# Altium PCB mix_v3.PcbDoc
Units mil, origin at the board's own origin, x right, y up, seen from the top; angles counter-clockwise.
Board outline 3779.53 x 1850.39 mil, 2 copper layers (Top Layer, Top, Bottom Layer, Bottom); 67 components, 40 nets, 207 pads, 64 vias.
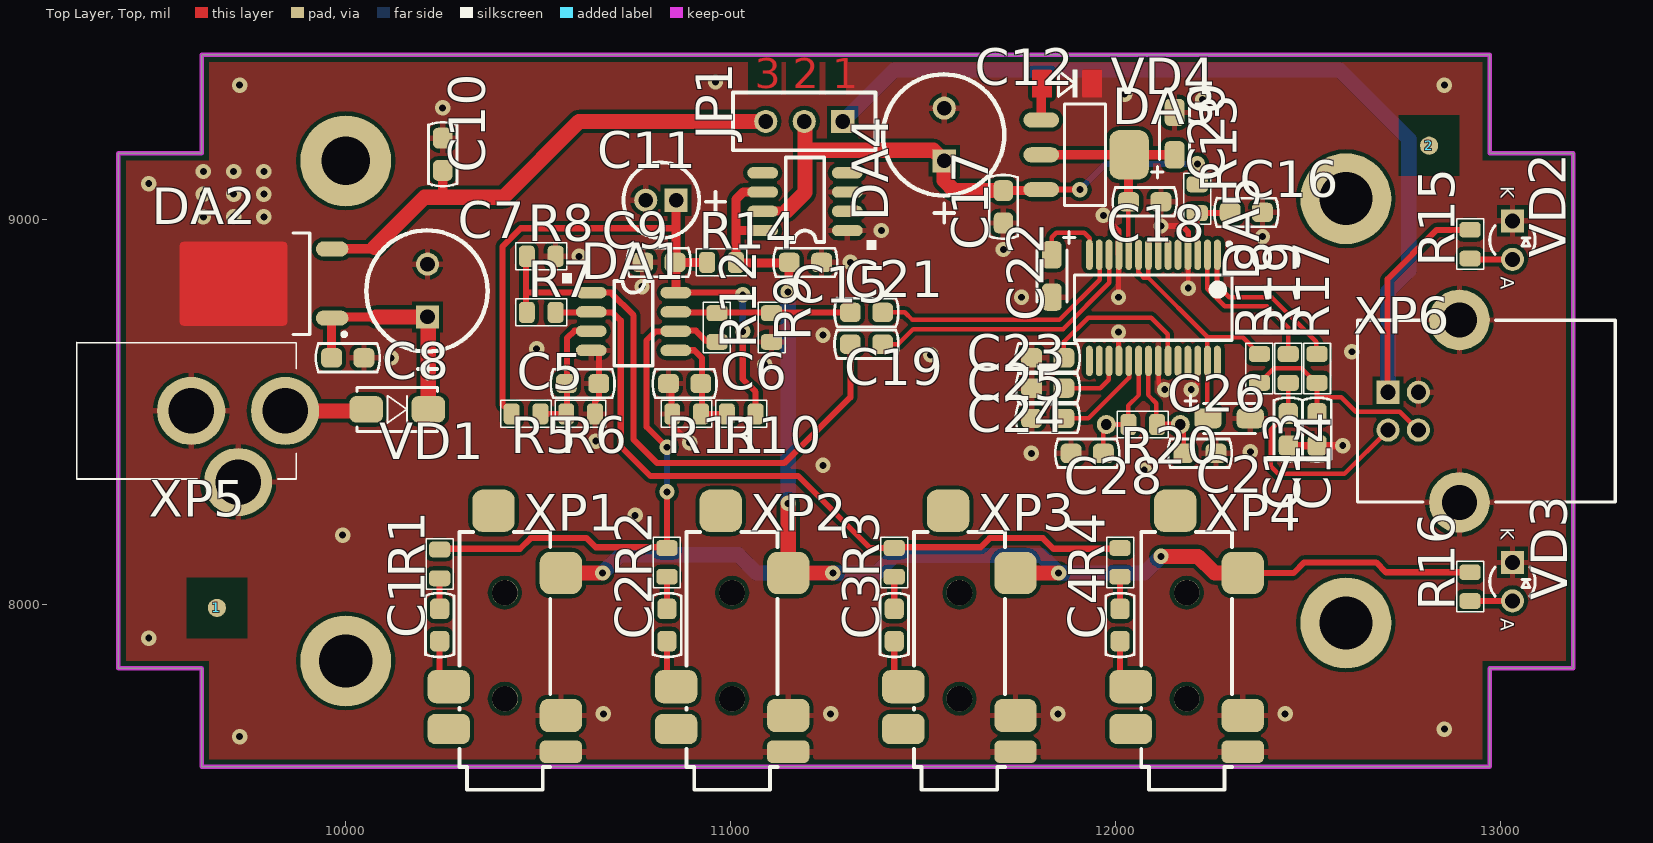
[diagram p0: Top Layer, Top view]
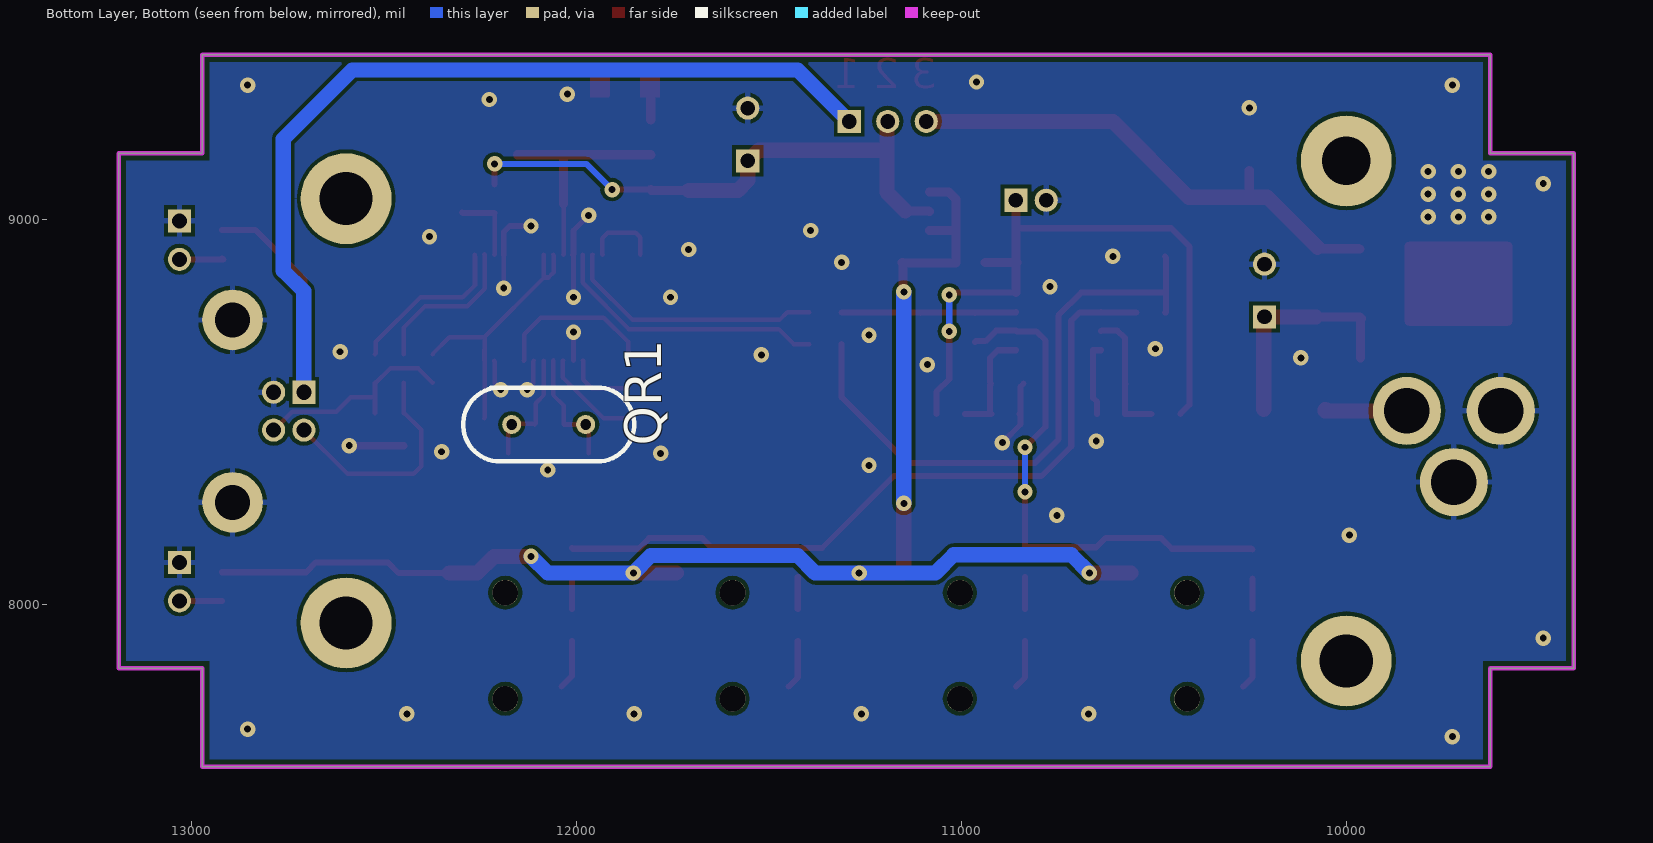
[diagram p1: Bottom Layer, Bottom view, seen from below]

## Layer stack, top to bottom
Top Solder, Top Mask: solder mask 0.4, Solder Resist, Dk 3.5
Top Layer, Top: signal copper 1.4
Dielectric 1: dielectric 12.6, FR-4, Dk 4.8
Bottom Layer, Bottom: signal copper 1.4
Bottom Solder, Bot Mask: solder mask 0.4, Solder Resist, Dk 3.5

## Board outline
12972.44,7834.65 13188.98,7834.65 13188.98,9173.23 12972.44,9173.23 12972.44,9429.13 9625.98,9429.13 9625.98,9173.23 9409.45,9173.23 9409.45,7834.65 9625.98,7834.65 9625.98,7578.74 12972.44,7578.74

## Design rules (kind name [scope] priority, off if disabled: settings)
Clearance [All] p1: gap=10 except(7.87: Arc-Arc Arc-Track Arc-THPad Arc-Via Track-Track Track-THPad Track-Via THPad-THPad THPad-Via Via-Via)
PlaneClearance [All] p1: clearance=10
PolygonConnect PolygonConnect_4 [IsPolygon And InNet('GND') And OnLayer('Bottom Layer, Bottom') vs IsVia] p1: connectstyle=Direct reliefconductorwidth=15 reliefentries=4 polygonreliefangle="90 Angle" airgapwidth=10
PolygonConnect PolygonConnect_3 [IsPolygon And InNet('GND') And OnLayer('Bottom Layer, Bottom') vs IsPad] p2: connectstyle=Relief reliefconductorwidth=15 reliefentries=4 polygonreliefangle="90 Angle" airgapwidth=10
PolygonConnect PolygonConnect_2 [IsPolygon And InNet('GND') And OnLayer('Top Layer, Top') vs IsVia] p3: connectstyle=Direct reliefconductorwidth=15 reliefentries=4 polygonreliefangle="90 Angle" airgapwidth=10
PolygonConnect PolygonConnect_1 [IsPolygon And InNet('GND') And OnLayer('Top Layer, Top') vs IsPad] p4: connectstyle=Relief reliefconductorwidth=15 reliefentries=4 polygonreliefangle="90 Angle" airgapwidth=10
PolygonConnect [All] p5: connectstyle=Relief reliefconductorwidth=10 reliefentries=4 polygonreliefangle="90 Angle" airgapwidth=10
RoutingVias [All] p1: holewidth=28 width=50 viastyle="Through Hole" minholewidth=28 minwidth=50 maxholewidth=28 maxwidth=50
SolderMaskExpansion [All] p1: expansion=4
Width [All] p1: maxlimit=10 minlimit=10 preferedwidth=10
29 further rules are at their usual default settings.

## Components (designator, comment, footprint, x,y, rotation, side; value= is the part's Value field where it differs from the comment)
1 "{Value}" REPER1.2 9665.35,7992.13 r0 top
2 "{Value}" REPER1.2 12814.96,9192.91 r0 top
C1 "0.1uF" CC0805-MIDI-2M1 10244.09,7905.51 r90 top
C2 "0.1uF" CC0805-MIDI-2M1 10834.65,7905.51 r90 top
C3 "0.1uF" CC0805-MIDI-2M1 11425.2,7905.51 r90 top
C4 "0.1uF" CC0805-MIDI-2M1 12011.81,7905.51 r90 top
C5 "1uF" CC0805-MIDI-2M1 10657.48,8574.8 r180 top
C6 "1uF" CC0805-MIDI-2M1 10838.58,8574.8 r0 top
C7 "470uFx25V" CC8X11 10212.6,8748.03 r90 top
C8 "0.1uF" CC0805-MIDI-2M1 10047.24,8641.73 r180 top
C9 "0.1uF" CC0805-MIDI-2M1 10771.65,8889.76 r0 top
C10 "0.1uF" CC0805-MIDI-2M1 10251.97,9212.6 r270 top
C11 "10uFx16V" CC4X8 10858.27,9051.18 r180 top
C12 "220uFx16V" CC8X11 11555.12,9153.54 r90 top
C13 "22 pF" CC0805-MIDI-2M1 12448.82,8413.39 r90 top
C14 "22 pF" CC0805-MIDI-2M1 12523.62,8413.39 r90 top
C15 "0.1uF" CC0805-MIDI-2M1 11236.22,8889.76 r180 top
C16 "1uF" CC0805-MIDI-2M1 12381.89,9019.68 r180 top
C17 "0.1uF" CC0805-MIDI-2M1 11708.66,8992.13 r90 top
C18 "0.1uF" CC0805-MIDI-2M1 12118.11,9047.24 r180 top
C19 "1uF" CC0805-MIDI-2M1 11311.02,8677.17 r0 top
C20 "10uF" TAJ-A_M 12153.54,9169.29 r90 top
C21 "1uF" CC0805-MIDI-2M1 11311.02,8759.84 r0 top
C22 "10uF" TAJ-A_M 11834.65,8909.45 r270 top
C23 "1uF" CC0805-MIDI-2M1 11866.14,8641.73 r180 top
C24 "1uF" CC0805-MIDI-2M1 11866.14,8484.25 r180 top
C25 "1uF" CC0805-MIDI-2M1 11866.14,8562.99 r180 top
C26 "10uF" TAJ-A_M 12240.16,8484.25 r0 top
C27 "33 pF" CC0805-MIDI-2M1 12177.17,8393.7 r0 top
C28 "33 pF" CC0805-MIDI-2M1 11968.5,8393.7 r180 top
DA1 "" SO-8 10637.8,8811.02 r0 top
DA2 "" D-PAK(TO-252AA) 9787.4,8834.65 r180 top
DA3 "REG1117-3.3" SOT-223 11921.26,9169.29 r270 top
DA4 "" SO-8 11303.15,8972.44 r180 top
DA5 "" TSSOP28 12098.43,8771.65 r270 top
JP1 "" PIN3W 11291.34,9255.91 r180 top
QR1 "12 MHz" QR_LP_3_5 11976.38,8468.5 r0 bottom
R1 "12k" RC0805_2 10244.09,8106.3 r90 top
R2 "12k" RC0805_2 10834.65,8110.24 r90 top
R3 "12k" RC0805_2 11425.2,8110.24 r90 top
R4 "12k" RC0805_2 12011.81,8110.24 r90 top
R5 "12k" RC0805_2 10468.5,8496.06 r180 top
R6 "12k" RC0805_2 10610.24,8496.06 r180 top
R7 "12k" RC0805_2 10507.87,8759.84 r180 top
R8 "2K7" RC0805_2 10507.87,8905.51 r0 top
R9 "2K7" RC0805_2 11106.3,8720.47 r270 top
R10 "12k" RC0805_2 11027.56,8496.06 r0 top
R11 "12k" RC0805_2 10885.83,8496.06 r0 top
R12 "12k" RC0805_2 10964.57,8720.47 r90 top
R13 "2.2 Om" RC0805_2 12212.6,9055.12 r270 top
R14 "10" RC0805_2 10976.38,8889.76 r0 top
R15 "560" RC0805_2 12921.26,8937.01 r90 top
R16 "470" RC0805_2 12921.26,8047.24 r90 top
R17 "22" RC0805_2 12523.62,8614.17 r90 top
R18 "1k5" RC0805_2 12374.02,8614.17 r90 top
R19 "22" RC0805_2 12448.82,8614.17 r90 top
R20 "1M" RC0805_2 12070.87,8468.5 r0 top
VD1 "" SMA 10133.86,8507.87 r0 top
VD2 "" LED3 13031.5,8997.64 r270 top
VD3 "" LED3 13031.5,8110.24 r270 top
VD4 "" SOD80 11874.02,9354.33 r180 top
XP1 "{Value}" SJ-43514-SMT 10413.39,7755.91 r0 top
XP2 "{Value}" SJ-43514-SMT 11003.94,7755.91 r0 top
XP3 "{Value}" SJ-43514-SMT 11594.49,7755.91 r0 top
XP4 "{Value}" SJ-43514-SMT 12185.04,7755.91 r0 top
XP5 "DCJ2" DCJ25 9720.47,8318.9 r0 top
XP6 "" USB-B 12893.7,8503.94 r270 top

## Footprints (in the part's own frame and the unit in brackets; to place one, negate y for a bottom-side part, rotate by r counter-clockwise, add the part's x,y. Pads: shape width x height; smd on the part's side, far side on the other; paste and mask are expansions set on the pad)
CC4X8 [mil]
  rect 60x60 hole 38: 1(0,0)
  round 60 hole 38: 2(78.74,0)
  silkscreen extent -128,-98 136,98
CC8X11 [mil]
  rect 60x60 hole 38: 1(0,0)
  round 60 hole 38: 2(137,0)
  silkscreen extent -160,-156 225,159
CC0805-MIDI-2M1 [mil]
  rrect50% 54x50 smd: 1(0,0) 2(84,0)
  silkscreen extent -41,-37 125,37
D-PAK(TO-252AA) [mm]
  oval 2.15x1 smd: 1(-4.5,2.28) 3(-4.5,-2.28)
  round 0 smd paste-25.4 mask-25.4: 2(2,0)
  Top Layer, Top region: -1.55,-2.5 -1.513,-2.638 -1.412,-2.738 -1.275,-2.775 5.275,-2.775 5.413,-2.738 5.513,-2.638 5.55,-2.5 5.55,2.5 5.513,2.638 5.413,2.738 5.275,2.775 -1.275,2.775 -1.412,2.738 -1.513,2.638 -1.55,2.5
  silkscreen extent -5.42,-3.35 -1.92,3.47
DCJ25 [mm]
  round 4.5 hole 3: 1(-3.1,4.7) 2(0,0) 3(3.1,4.7)
  silkscreen extent -10.65,0.2 3.84,9.2
LED3 [mil]
  rect 60x60 hole 39: 1(0,0)
  round 60 hole 39: 2(100,0)
  silkscreen extent 12,-59 88,59
PIN3W [mil]
  rect 60x60 hole 38: 1(0,0)
  round 60 hole 38: 2(100,0) 3(200,0)
  silkscreen extent -85,-75 285,75
QR_LP_3_5 [mm]
  round 1.25 hole 0.7: 1(0,0) 2(4.88,0)
  silkscreen extent -3.2,-2.44 8.08,2.44
RC0805_2 [mm]
  rrect50% 1.05x1.4 smd: 1(-0.95,0) 2(0.95,0)
  silkscreen extent -1.67,-0.89 1.67,0.89
REPER1.2 [mm]
  round 1.2 smd paste-25.4 mask-25.4: 1(0,0)
SJ-43514-SMT [mm]
  rrect50% 2.8x1.5 smd: 1(3.7,-3.5)
  rrect50% 2.8x2.8 smd: 2(3.7,8.3) 5(-0.75,12.4)
  rrect50% 2.8x2.2 smd: 3(-3.7,0.8) 4(3.7,-1.1)
  rrect50% 2.8x2 smd: 6(-3.7,-2)
  round 1.7 hole 1.7 unplated: 7(0,7) 8(0,0)
  silkscreen extent -3,-6 3,11
SMA [mm]
  rrect50% 2.2x1.75 smd: 1(-2.05,0) 2(2.05,0)
  silkscreen extent -2.65,-1.45 2.65,1.45
SO-8 [mil]
  oval 80x29.53 smd: 1(0,0) 2(0,-50) 3(0,-100) 4(0,-150) 5(220,-150) 6(220,-100) 7(220,-50) 8(220,0)
  silkscreen extent -75,-190 160,50
SOD80 [mil]
  round 0 smd paste-1000 mask-1000: 1(65,0) 2(-65,0)
  Top Layer, Top region: 39.41,-33.07 40.27,-35.16 42.36,-36.02 87.64,-36.02 89.73,-35.16 90.59,-33.07 90.59,33.07 89.73,35.16 87.64,36.02 42.36,36.02 40.27,35.16 39.41,33.07
  Top Layer, Top region: -39.41,33.07 -40.27,35.16 -42.36,36.02 -87.64,36.02 -89.73,35.16 -90.59,33.07 -90.59,-33.07 -89.73,-35.16 -87.64,-36.02 -42.36,-36.02 -40.27,-35.16 -39.41,-33.07
  silkscreen extent -26,-36 22,36
SOT-223 [mm]
  oval 1x2.35 smd: 1(-2.3,-2.9) 2(0,-2.9) 3(2.3,-2.9)
  rrect50% 3.25x2.6 smd: 4(0,2.9)
  silkscreen extent -3.35,-1.35 3.35,1.35
TAJ-A_M [mm]
  rrect50% 1.8x1.3 smd: 1(0,0) 2(2.794,0)
  silkscreen extent -1.52,-0.99 3.12,1.52
TSSOP28 [mm]
  oval 2x0.45 smd: 1(-3.5,4.225) 2(-3.5,3.575) 3(-3.5,2.925) 4(-3.5,2.275) 5(-3.5,1.625) 6(-3.5,0.975) 7(-3.5,0.325) 8(-3.5,-0.325) 9(-3.5,-0.975) 10(-3.5,-1.625) 11(-3.5,-2.275) 12(-3.5,-2.925) 13(-3.5,-3.575) 14(-3.5,-4.225) 15(3.5,-4.225) 16(3.5,-3.575) 17(3.5,-2.925) 18(3.5,-2.275) 19(3.5,-1.625) 20(3.5,-0.975) 21(3.5,-0.325) 22(3.5,0.325) 23(3.5,0.975) 24(3.5,1.625) 25(3.5,2.275) 26(3.5,2.925) 27(3.5,3.575) 28(3.5,4.225)
  silkscreen extent -4.32,-5.2 2.14,5.2
USB-B [mm]
  rect 1.524x1.524 hole 1: 1(-1.23,-4.71)
  round 1.524 hole 1: 2(1.27,-4.71) 3(1.27,-2.71) 4(-1.23,-2.71)
  round 4 hole 2.3: 5(-6,0) 6(6.04,0)
  silkscreen extent -5.98,-6.72 6.02,10.28

## Free pads (board coordinates)
  round 236.22 hole 137.8 unplated: 0(10000,7854.33) 0(12598.43,7952.76) 0(12598.43,9055.12)
  round 236.22 hole 125.98 unplated: 0(10000,9153.54)

## Via types
v1: diameter 40, hole 18, Top Layer, Top to Bottom Layer, Bottom, 64 vias

## Nets (pads, with @x,y where several pads share a name; then routed paths per layer and width w, separated by ;. In a path a pad name is that pad's centre, name@x,y a point inside that pad or via, vN(x,y) a via of type N, cw(c..) or ccw(c..) an arc to the next point about the centre after c; other vN are vias at no path point)
+3.5V: C18.2 C20.1 DA3.2 DA3.4 DA5.10 | length 613.7
  Top Layer, Top w11.81: C18.2 12034.11,9041.98 12033.46,9041.34 12033.46,8910.43 DA5.10
  Top Layer, Top w23.62: DA3.2 DA3.4 ; C18.2@12033.46,9041.34 12033.46,9167.32 DA3.4 ; C20.1 DA3.4
+5V: C12.1 C17.2 DA3.3 DA4.7 JP1.2 R13.1 | length 1491.9
  Top Layer, Top w15.75: DA3.3 v1(11907.48,9078.74) ; R13.1 v1(12212.6,9145.67)
  Top Layer, Top w23.62: DA4.7 11084.33,9023.62 11145.67,9023.62 ; C17.2 11708.66,9076.77 11805.12,9076.77 DA3.3
  Top Layer, Top w39.37: 11145.67,9023.62 11192.91,9070.87 11192.91,9181.1 ; JP1.2 11192.91,9255.91 11192.91,9181.1 ; C17.2 11708.02,9076.77 11580.71,9076.77 11555.12,9102.36 C12.1 11527.56,9181.1 11192.91,9181.1
  Bottom Layer, Bottom w15.75: v1(11907.48,9078.74) 11974.41,9145.67 v1(12212.6,9145.67)
GND: C5.1 C6.1 C7.2 C8.1 C9.1 C10.1 C11.2 C12.2 C13.1 C14.1 C15.1 C16.1 C17.1 C18.1 C20.2 C22.2 C23.2 C24.2 C25.2 C26.2 C27.2 C28.2 DA1.4 DA2.2 DA4.1 DA4.3 DA5.4 DA5.11 DA5.18 DA5.22 DA5.26 R6.1 R8.2 R9.2 R11.1 VD2.1 VD3.1 VD4.2 XP1.1 XP1.4 XP2.1 XP2.4 XP3.1 XP3.4 XP4.1 XP4.4 XP5.1 XP5.2 XP6.4 XP6.5 XP6.6 | length 1202.3
  Top Layer, Top w11.81: v1(12007.87,8708.66) 12007.87,8634.84 DA5.18 ; v1(12007.87,8799.21) 12007.87,8908.46 DA5.11 ; DA5.22 12112.2,8632.87 12112.2,8574.8 v1(12127.95,8559.06) ; v1(12188.98,8822.83) 12188.98,8908.46 DA5.4 DA5.4@12188.98,8909.45 ; v1(12196.85,8559.06) 12212.6,8574.8 12212.6,8631.89 DA5.26
  Top Layer, Top w14.96: v1(11968.5,9011.81) 12007.87,8972.44 12007.87,8910.43 DA5.11 ; v1(12118.11,8984.25) 12173.23,8984.25 12188.98,8968.5 DA5.4@12188.98,8909.45
  Top Layer, Top w15.75: DA1.4 10637.8,8661.42 10657.48,8661.42 C5.1 10657.48,8537.4 10647.64,8527.56 R6.1 ; C6.1 10846.46,8566.93 R11.1@10846.46,8496.06 ; R11.1 R11.1@10846.46,8496.06 ; v1(10893.7,8421.26) 10846.46,8468.5 R11.1@10846.46,8496.06
  Top Layer, Top w19.68: C13.1 C14.1 v1(12590.55,8413.39)
  other v1: 9724.41,7657.48 12854.33,7677.17 10669.29,7716.54 11259.84,7716.54 11850.39,7716.54 12440.94,7716.54 9488.19,7913.39 9992.13,8181.1 10751.97,8232.28 12074.8,8350.39 11240.16,8362.2 11781.5,8393.7 12350.39,8397.64 10649.61,8425.2 11088.58,8624.02 10118.11,8641.73 11519.68,8649.61 12614.17,8657.48 10496.06,8665.35 11240.16,8700.79 11755.91,8799.21 10769.68,8826.77 11311.02,8889.76 10606.3,8905.51 11708.66,8923.23 12381.89,8956.69 11391.73,8972.44 9629.92,9007.87 9708.66,9007.87 9787.4,9007.87 9629.92,9066.93 9708.66,9066.93 9787.4,9066.93 9488.19,9094.49 9629.92,9125.98 9708.66,9125.98 9787.4,9125.98 10251.97,9291.34 12226.38,9312.99 12023.62,9326.77 9724.41,9350.39 12854.33,9350.39 10960.63,9358.27
IN1: C1.1 XP1.3 | length 127.9
  Top Layer, Top w15.75: C1.1 10244.09,7811.02 XP1.3
IN2: C2.1 XP2.3 | length 127.9
  Top Layer, Top w15.75: C2.1 10834.65,7811.02 XP2.3
IN3: C3.1 XP3.3 | length 127.9
  Top Layer, Top w15.75: C3.1 11425.2,7811.02 XP3.3
IN4: C4.1 XP4.3 | length 129.5
  Top Layer, Top w15.75: C4.1 12011.81,7814.96 XP4.3
MIC_PW: C15.2 DA4.6 DA4.8 R14.2 R16.2 XP1.2 XP2.2 XP3.2 XP4.2 | length 3986.6
  Top Layer, Top w15.75: XP4.2 12462.6,8082.68 12490.16,8110.24 12677.17,8110.24 12702.76,8084.65 R16.2
  Top Layer, Top w23.62: DA4.8 11013.78,8972.44 ; DA4.6 11082.76,9072.83 11033.46,9072.83 11013.78,9053.15 11013.78,8972.44 ; v1(11149.61,8812.99) 11151.57,8814.96 C15.2@11151.57,8889.12 ; C15.2@11153.54,8889.76 C15.2 ; 11013.78,8972.44 R14.2 11013.78,8887.8 11150.25,8887.8 C15.2@11151.57,8889.12 ; C15.2@11151.57,8889.12 11151.57,8889.76 C15.2 ; C15.2@11151.57,8889.12 C15.2
  Top Layer, Top w39.37: XP1.2 v1(10667.32,8082.68) ; v1(11149.61,8263.78) XP2.2 v1(11265.75,8082.68) ; XP3.2 v1(11852.36,8082.68) ; v1(12118.11,8125.98) 12214.57,8125.98 12257.87,8082.68 XP4.2
  Bottom Layer, Bottom w39.37: v1(10667.32,8082.68) 10714.57,8129.92 11019.68,8129.92 11066.93,8082.68 v1(11265.75,8082.68) 11379.92,8082.68 11425.2,8127.95 11807.09,8127.95 v1(11852.36,8082.68) 12074.8,8082.68 v1(12118.11,8125.98) ; v1(11149.61,8263.78) v1(11149.61,8812.99)
NET00000: C1.2 R1.1 | length 79.4
  Top Layer, Top w15.75: C1.2 R1.1
NET00001: R15.1 VD2.2 | length 118.6
  Top Layer, Top w15.75: R15.1 12917.32,8897.64 VD2.2
NET00002: JP1.1 R15.2 XP6.1 | length 2842.9
  Top Layer, Top w15.75: XP6.1 12706.69,8553.94 12706.69,8846.46 12834.65,8974.41 R15.2
  Bottom Layer, Bottom w39.37: JP1.1 11425.2,9389.76 12582.68,9389.76 12761.81,9210.63 12761.81,8868.11 12708.66,8814.96 12708.66,8553.15 12708.66,8552.76 XP6.1
NET00003: C3.2 R3.1 | length 83.3
  Top Layer, Top w15.75: C3.2 R3.1
NET00004: C10.2 DA2.3 JP1.3 | length 1338.5
  Top Layer, Top w23.62: DA2.3 9967.72,8924.41 9968.5,8925.2 10074.8,8925.2 10074.8,8929.13 ; 10246.76,9059.06 10251.97,9062.99 C10.2
  Top Layer, Top w39.37: 10074.8,8929.13 10204.72,9059.06 10246.76,9059.06 10409.45,9059.06 10606.3,9255.91 JP1.3
NET00005: C7.1 C8.2 DA2.1 VD1.2 | length 602.3
  Top Layer, Top w23.62: C8.2 9963.24,8744.09 9960.63,8744.09 DA2.1 9964.57,8748.03 10078.74,8748.03
  Top Layer, Top w39.37: 10078.74,8748.03 C7.1 10214.57,8748.03 VD1.2
NET00006: C5.2 DA1.3 R5.1 R6.2 | length 343.8
  Top Layer, Top w15.75: R5.1 R6.2 ; R6.2@10574.8,8496.06 R6.2 ; DA1.3 10636.22,8712.6 10594.49,8712.6 10574.8,8692.91 C5.2@10574.8,8574.8 ; R6.2 10574.8,8498.03 C5.2@10574.8,8570.87 ; C5.2@10574.8,8570.87 C5.2@10574.8,8574.8 ; C5.2@10574.8,8570.87 C5.2 C5.2@10574.8,8574.8
NET00007: C22.1 DA5.14 | length 198
  Top Layer, Top w11.81: C22.1 11834.65,8954.72 11846.46,8966.54 11919.29,8966.54 11933.07,8952.76 11933.07,8910.43 DA5.14
NET00008: C2.2 R2.1 | length 83.3
  Top Layer, Top w15.75: C2.2 R2.1
NET00009: C4.2 R4.1 | length 83.3
  Top Layer, Top w15.75: C4.2 R4.1
NET00014: DA3.1 VD4.1 | length 96.4
  Top Layer, Top w23.62: DA3.1 11807.09,9354.33 VD4.1
NET00021: DA1.2 R3.2 R4.2 R7.1 | length 1936.7
  Top Layer, Top w15.75: R7.1 DA1.2@10637.8,8759.84 ; DA1.2 DA1.2@10637.8,8759.84 ; R4.2 12009.84,8145.67 11838.58,8145.67 11811.02,8173.23 11673.23,8173.23 11649.61,8149.61 11425.2,8149.61 R3.2 11362.2,8147.64 11175.2,8334.65 10791.34,8334.65 10714.57,8411.42 10714.57,8738.19 10692.91,8759.84 DA1.2@10637.8,8759.84
NET00023: DA1.6 R1.2 R2.2 R12.1 | length 1380.3
  Top Layer, Top w15.75: R1.2 10246.06,8145.67 10452.76,8145.67 10480.32,8173.23 10625.98,8173.23 10649.61,8149.61 R2.2@10834.65,8149.61 ; R2.2 R2.2@10834.65,8149.61 ; v1(10834.65,8293.31) R2.2@10834.65,8149.61 ; v1(10834.65,8409.45) 10781.5,8462.6 10781.5,8687.01 10805.12,8710.63 10856.3,8710.63 DA1.6 10858.27,8712.6 10909.45,8712.6 10937.01,8685.04 10962.6,8685.04 R12.1
  Bottom Layer, Bottom w15.75: v1(10834.65,8293.31) v1(10834.65,8409.45)
NET00025: VD1.1 XP5.3 | length 218.5
  Top Layer, Top w39.37: XP5.3 10055.12,8503.94 10055.12,8507.87 VD1.1
NET00027: R16.1 VD3.2 | length 110.4
  Top Layer, Top w15.75: R16.1 13031.1,8009.84 VD3.2
NET00030: C6.2 DA1.5 R10.1 R11.2 | length 293
  Top Layer, Top w15.75: DA1.5 10858.27,8661.42 10905.51,8661.42 10925.2,8641.73 10925.2,8577.42 C6.2 10925.2,8570.87 10925.2,8498.03 R11.2 ; R11.2@10921.26,8496.06 R11.2 ; R10.1 R11.2
NET00042: C26.1 DA5.8 DA5.9 DA5.27 R18.2 | length 782.8
  Top Layer, Top w11.81: DA5.9 12059.06,8908.46 12059.06,8864.17 12072.83,8850.39 12084.65,8850.39 ; DA5.8 12084.65,8908.46 12084.65,8850.39 ; C26.1 12238.19,8486.22 DA5.27@12238.19,8633.86 ; R18.2 12330.71,8694.88 12238.19,8694.88 ; 12084.65,8850.39 12238.19,8696.85 12238.19,8694.88 ; DA5.27@12238.19,8633.86 12238.19,8694.88 ; DA5.27@12238.19,8633.86 DA5.27 12238.19,8694.88
NET00050: DA5.1 R17.2 | length 430.2
  Top Layer, Top w11.81: DA5.1 12263.78,8905.51 12263.78,8830.71 12295.28,8799.21 12405.51,8799.21 12521.65,8683.07 12521.65,8653.54 R17.2
NET00052: DA5.2 R19.2 | length 413.9
  Top Layer, Top w11.81: DA5.2 12238.19,8911.42 12238.19,8820.87 12283.46,8775.59 12393.7,8775.59 12448.82,8720.47 R19.2
NET00059: C21.2 DA5.13 | length 681
  Top Layer, Top w11.81: C21.2 11452.76,8759.84 11472.44,8740.16 11854.33,8740.16 11958.66,8844.49 11958.66,8909.45 DA5.13
NET00066: C19.2 DA5.12 | length 729.1
  Top Layer, Top w11.81: C19.2 11435.04,8677.17 11474.41,8716.54 11864.17,8716.54 11984.25,8836.61 11984.25,8909.45 DA5.12
NET00081: C27.1 DA5.21 QR1.2 R20.2 | length 316.5
  Top Layer, Top w11.81: DA5.21 12084.65,8631.89 12084.65,8545.28 12106.3,8523.62 12106.3,8470.47 R20.2 12108.27,8470.47 12166.54,8470.47 QR1.2 12177.17,8458.66 C27.1
NET00082: C28.1 DA5.20 QR1.1 R20.1 | length 315.3
  Top Layer, Top w11.81: C28.1 11968.5,8458.66 11976.38,8466.54 QR1.1 R20.1 12033.46,8517.72 12061.02,8545.28 DA5.20@12061.02,8634.84 ; DA5.20 DA5.20@12061.02,8634.84 ; DA5.20@12061.02,8635.83 DA5.20@12061.02,8634.84
NET00088: C23.1 DA5.23 | length 424.4
  Top Layer, Top w11.81: C23.1 11866.14,8683.07 11929.13,8746.06 12092.52,8746.06 12135.83,8702.76 12135.83,8634.84 DA5.23
NET00091: C24.1 DA5.19 | length 257.6
  Top Layer, Top w11.81: C24.1 11929.13,8484.25 12035.43,8590.55 12035.43,8629.92 12035.43,8633.86 DA5.19
NET00092: C25.1 DA5.17 | length 175.3
  Top Layer, Top w11.81: C25.1 11960.63,8562.99 11982.28,8584.65 11982.28,8633.86 DA5.17
USB_D+: C14.2 R17.1 R18.1 XP6.3 | length 558.8
  Top Layer, Top w11.81: R18.1 12411.42,8614.17 12484.25,8614.17 12521.65,8576.77 R17.1 12523.62,8539.37 ; C14.2 12523.62,8539.37 ; XP6.3 12738.98,8501.97 12624.02,8501.97 12586.61,8539.37 12523.62,8539.37
USB_D-: C13.2 R19.1 XP6.2 | length 596.9
  Top Layer, Top w11.81: C13.2 C13.2@12448.82,8498.03 ; R19.1 C13.2@12448.82,8498.03 ; XP6.2 12594.88,8340.55 12423.23,8340.55 12403.54,8360.24 12403.54,8454.72 12446.85,8498.03 C13.2@12448.82,8498.03
USB_VBUS: C16.2 DA5.3 R13.2 | length 194.8
  Top Layer, Top w11.81: R13.2 12212.6,8910.43 DA5.3
  Top Layer, Top w15.75: R13.2 12295.92,9017.72 C16.2
VCC: C9.2 C11.1 DA1.8 R5.2 R10.2 R14.1 | length 1739.5
  Top Layer, Top w15.75: R5.2 10407.48,8519.68 10407.48,8931.1 10454.72,8978.35 10856.3,8978.35 10858.27,8980.32 ; DA1.8 10858.27,8811.02 11025.59,8811.02 v1(11031.5,8805.12) ; v1(11031.5,8710.63) 11031.5,8586.61 11064.96,8553.15 R10.2
  Top Layer, Top w23.62: DA1.8 10858.27,8811.5 10858.27,8885.83 C9.2 C9.2@10858.27,8889.76 ; C11.1 10858.27,8980.32 C9.2@10858.27,8889.76 ; R14.1 C9.2@10858.27,8889.76
  Bottom Layer, Bottom w15.75: v1(11031.5,8710.63) v1(11031.5,8805.12)
VINL: C19.1 DA1.1 R7.2 R8.1 | length 1574.7
  Top Layer, Top w15.75: R8.1 10468.5,8901.57 10468.5,8811.02 ; C19.1 11311.02,8539.37 11139.76,8368.11 10809.06,8368.11 10748.03,8429.13 10748.03,8751.97 10688.98,8811.02 DA1.1 10468.5,8811.02 ; R7.2@10468.5,8761.81 10468.5,8811.02 ; R7.2@10468.5,8761.81 10468.5,8759.84 R7.2 R7.2@10468.5,8761.81
VINR: C21.1 DA1.7 R9.1 R12.2 | length 459.6
  Top Layer, Top w15.75: DA1.7 10858.27,8759.84 10962.6,8759.84 R12.2 10964.57,8759.84 11104.33,8759.84 R9.1 11106.3,8759.84 C21.1
pads on no net: 1.1 2.1 DA4.2 DA4.4 DA4.5 DA5.5 DA5.6 DA5.7 DA5.15 DA5.16 DA5.24 DA5.25 DA5.28 XP1.5 XP1.6 XP1.7 XP1.8 XP2.5 XP2.6 XP2.7 XP2.8 XP3.5 XP3.6 XP3.7 XP3.8 XP4.5 XP4.6 XP4.7 XP4.8

## Polygon pours and split planes (outlines as drawn)
GND on Top Layer, Top (solid, remove dead copper, pour order 0): 9645.67,7854.33 9645.67,7598.43 12952.76,7598.43 12952.76,7854.33 13169.29,7854.33 13169.29,9153.54 12952.76,9153.54 12952.76,9409.45 9645.67,9409.45 9645.67,9153.54 9429.13,9153.54 9429.13,7854.33
GND on Bottom Layer, Bottom (solid, pour order 2): 9429.13,7854.33 9645.67,7854.33 9645.67,7598.43 12952.76,7598.43 12952.76,7854.33 13169.29,7854.33 13169.29,8149.61 13169.29,9153.54 12952.76,9153.54 12952.76,9409.45 9645.67,9409.45 9645.67,9153.54 9429.13,9153.54

## Keep-outs
Keep-Out Layer, Board:
  lines w5: 9409.45,7834.65 9625.98,7834.65 9625.98,7578.74 12972.44,7578.74 12972.44,7834.65 13188.98,7834.65 13188.98,9173.23 12972.44,9173.23 12972.44,9429.13 9625.98,9429.13 9625.98,9173.23 9409.45,9173.23 9409.45,7834.65
  lines w11.81: 9409.45,7834.65 9625.98,7834.65 9625.98,7578.74 12972.44,7578.74 12972.44,7834.65 13188.98,7834.65 13188.98,9173.23 12972.44,9173.23 12972.44,9429.13 9625.98,9429.13 9625.98,9173.23 9409.45,9173.23 9409.45,7834.65

## Other copper
Top Layer, Top:
  pour cut-out: 11980.32,8933.07 12027.56,8933.07 12027.56,8996.06 11980.32,8972.44
  pour cut-out: 9586.61,7913.39 9744.09,7913.39 9744.09,8070.87 9586.61,8070.87
  pour cut-out: 12736.22,9114.17 12893.7,9114.17 12893.7,9271.65 12736.22,9271.65
  pour cut-out: 12153.54,8929.13 12200.79,8929.13 12200.79,8992.13 12153.54,8968.5
  text "3" at 11062.93,9342.52 h78.12
  text "2" at 11161.36,9342.52 h78.12
  text "1" at 11263.72,9342.52 h78.12

## Text inside footprints (layer, text, board x,y; h text height)
VD2: Top Overlay, Top Silk "A" at 13001.5,8852.64 h34.72 r270; Top Overlay, Top Silk "K" at 13001.5,9087.64 h34.72 r270
VD3: Top Overlay, Top Silk "A" at 13001.5,7965.24 h34.72 r270; Top Overlay, Top Silk "K" at 13001.5,8200.24 h34.72 r270